# EAGLE board promini5.5cm (EAGLE 9.6.2)
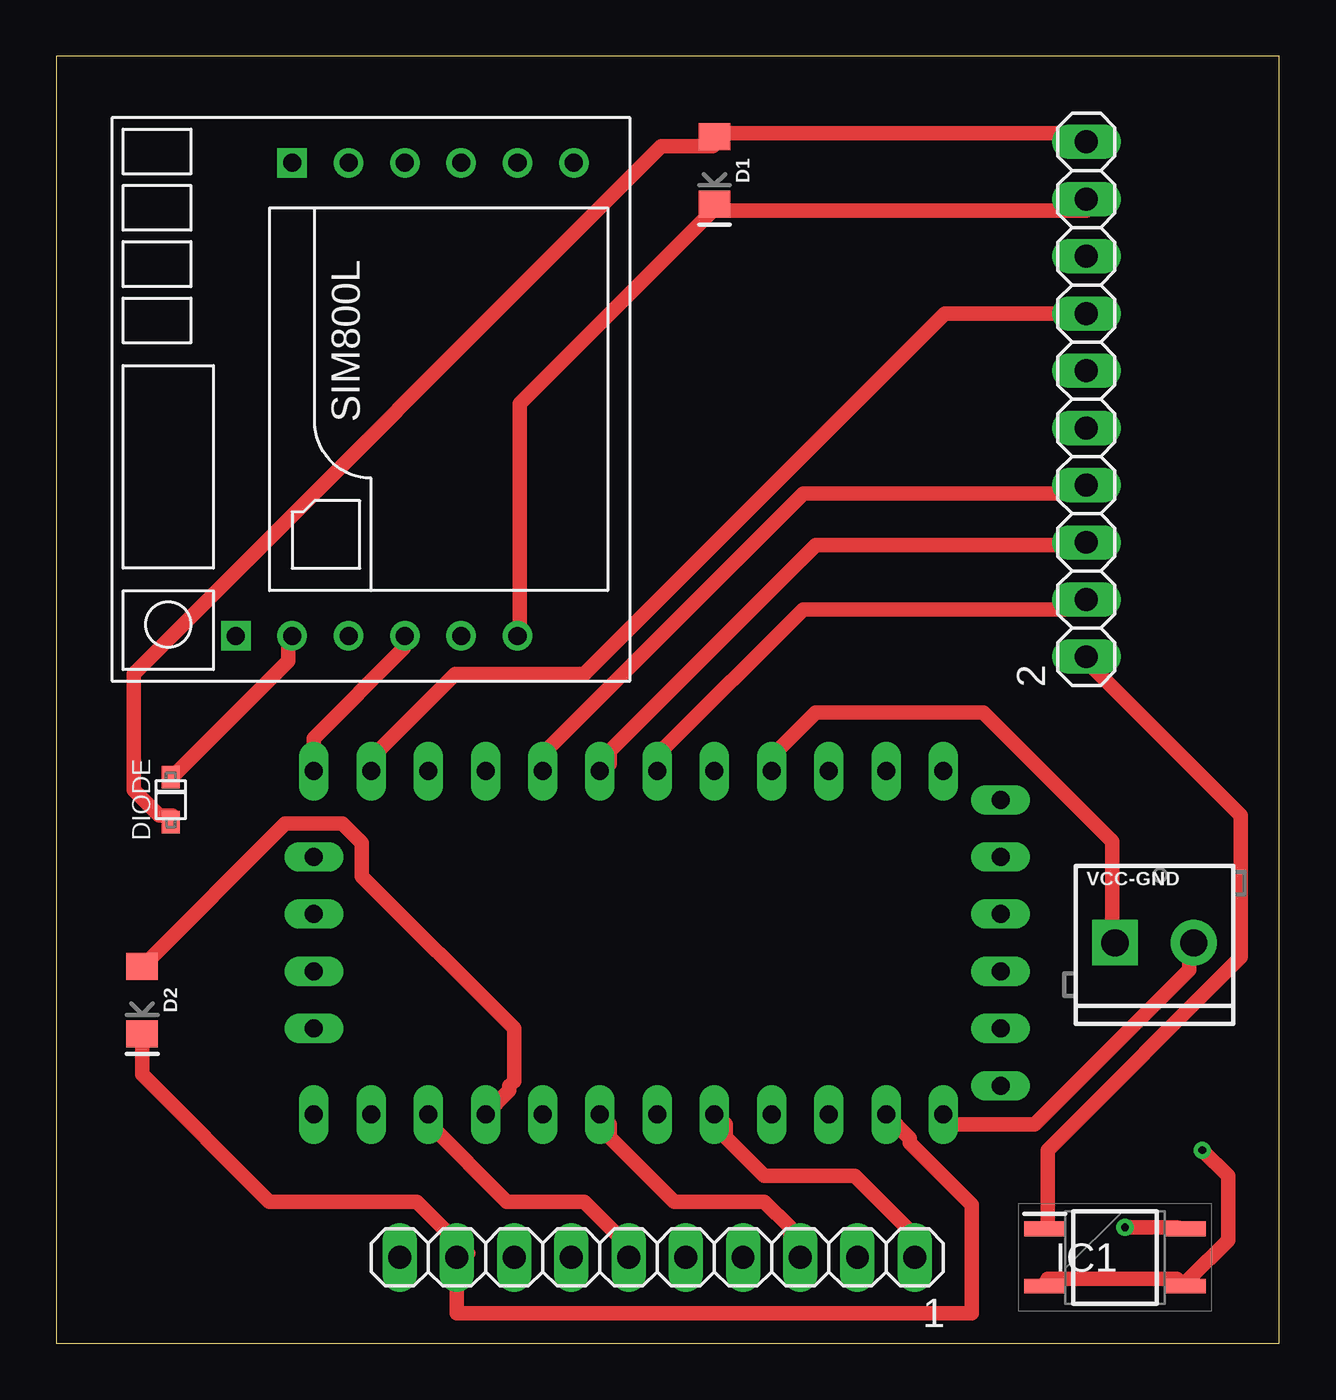
[diagram p0: board, top side]
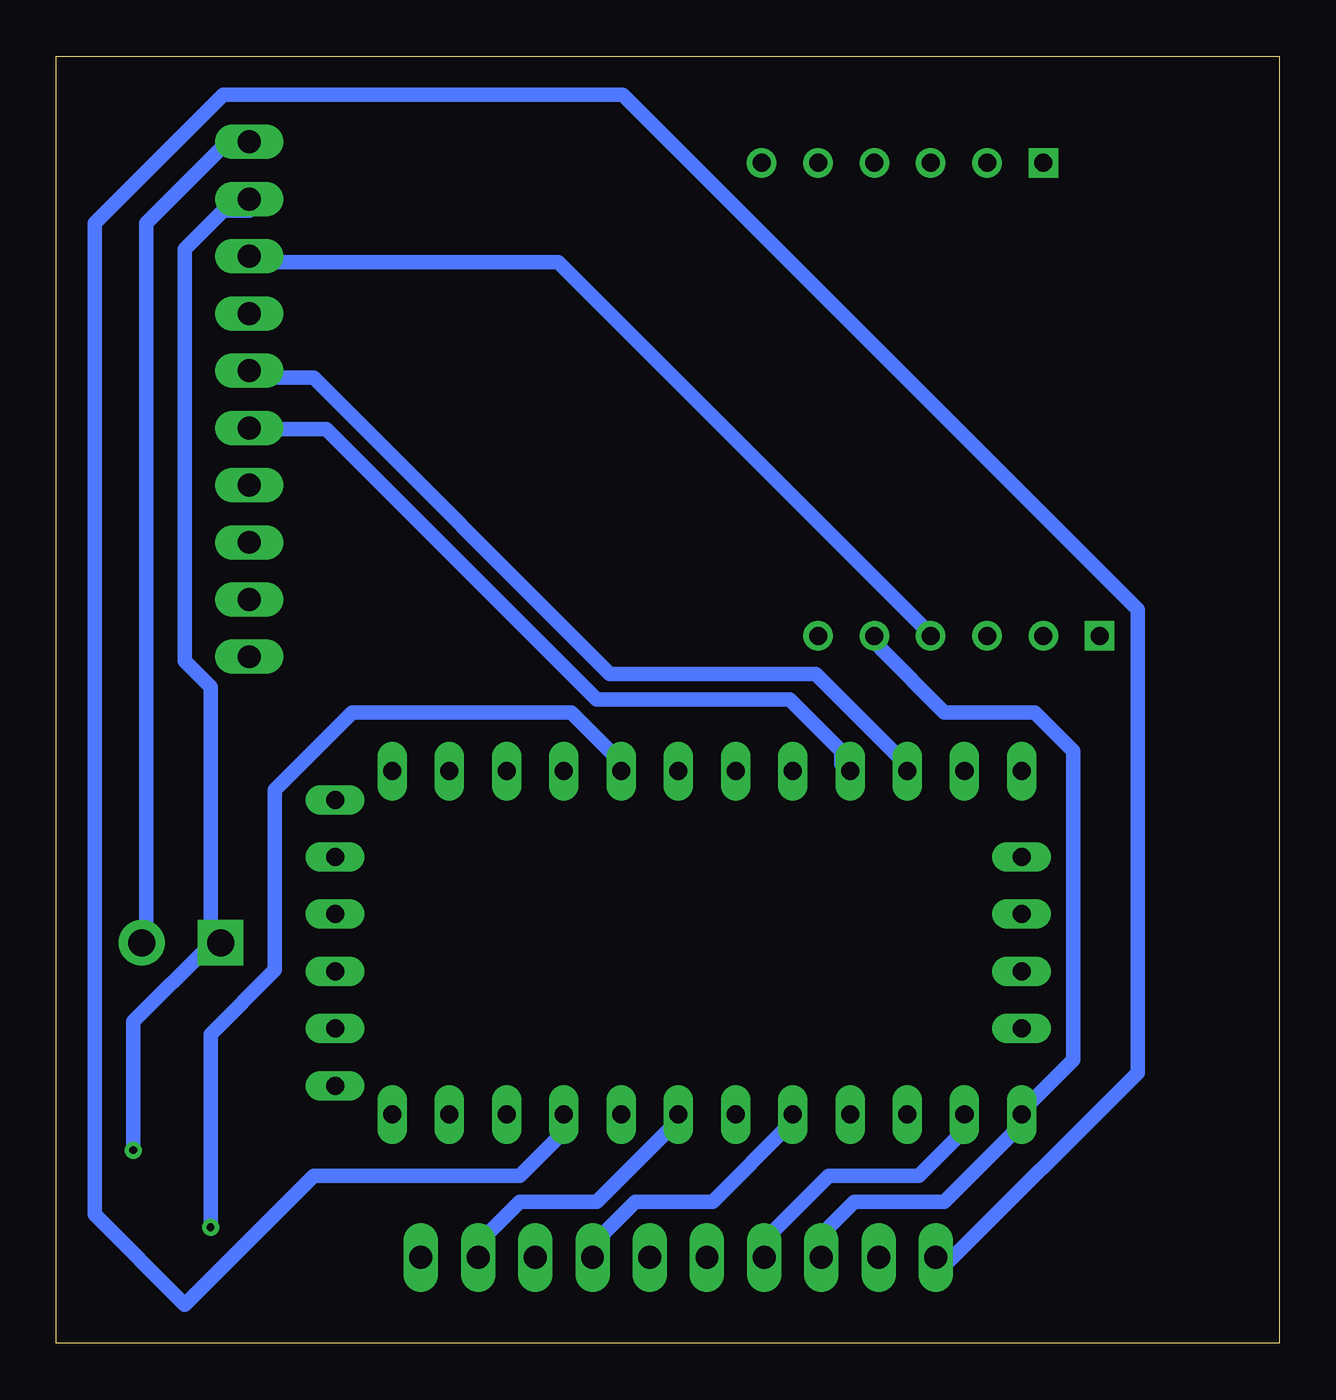
[diagram p1: board, bottom side, seen from below]

Size 54.28 x 57.14 mm. Coordinates in mm from the lower left corner, seen from the top.
Outline: 0,0 54.28,0 54.28,57.14 0,57.14 0,0
Copper layers (1*16): Top 0.035mm / dielectric 1.5mm / Bottom 0.035mm
Design rules "default *": minimum track width 25mil, minimum drill 0.35mm, track to track 20mil, track to pad 20mil, pad to pad 6mil, via to via 6mil, smd to smd 6mil, copper to edge 40mil, drill to drill 6mil, minimum pad ring 10mil, minimum via ring 8mil, stop-mask expansion 4mil, vias tented up to drill 0mil, thermal gap 10mil

## Footprints (pad centres in the part's own frame; a part is rotated, then mirrored left to right if it is on the bottom)
1X10 = drill 1.016 long: 1 -11.43,0; 2 -8.89,0; 3 -6.35,0; 4 -3.81,0; 5 -1.27,0; 6 1.27,0; 7 3.81,0; 8 6.35,0; 9 8.89,0; 10 11.43,0
LED-1206 = smd 1.2 x 1.4: A -1.5,0; C 1.5,0
SOD-323F = smd 1 x 0.8: A -1,0; C 1,0
SOP254P700X200-4N = smd 1.825 x 0.65: 1 -3.112,1.27; 2 -3.112,-1.27; 3 3.112,-1.27; 4 3.112,1.27
PRO-MINI = drill 0.8 long: A0 8.89,8.89; A1 8.89,11.43; A2 8.89,13.97; A3 8.89,16.51; A4 -2.54,-1.27; A5 0,-1.27; A6 2.54,-1.27; A7 5.08,-1.27; D2 -6.35,16.51; D3 -6.35,13.97; D4 -6.35,11.43; D5 -6.35,8.89; D6 -6.35,6.35; D7 -6.35,3.81; D8 -6.35,1.27; D9 -6.35,-1.27; D10 8.89,-1.27; D11 8.89,1.27; D12 8.89,3.81; D13 8.89,6.35; DTR 7.62,29.21; GND 8.89,24.13; GND1 -6.35,19.05; GND2 -5.08,29.21; GND3 -2.54,29.21; RAW 8.89,26.67; RST 8.89,21.59; RST1 -6.35,21.59; RX1 -6.35,24.13; RX1-1 2.54,29.21; TX0 -6.35,26.67; TX0-1 5.08,29.21; VCC 8.89,19.05; VCC1 0,29.21
SIM800LMODULE = drill 0.8: DTR 10.5,1; GND -10.5,-6.5; MIC+ 10.5,-1.5; MIC- 10.5,-4; RST -10.5,1; RX -10.5,-1.5; SPK+ 10.5,-6.5; SPK- 10.5,-9; TX -10.5,-4; VCC -10.5,3.5 | drill 0.8 square: NET -10.5,6; RING 10.5,3.5
SCREWTERMINAL-3.5MM-2 = drill 1.2 pad 2.032 square: 1 0,0 | drill 1.2 pad 2.032: 2 3.5,0

## Placement (x,y rotation side)
1  [1X10]  26.67,3.81 180 top
2  [1X10]  45.72,41.91 90 top
D1  RED  [LED-1206]  29.21,52.07 270 top
D2  RED  [LED-1206]  3.81,15.24 270 top
DIODE  [SOD-323F]  5.08,24.13 90 top
IC1  EL357N-B-TA-G  [SOP254P700X200-4N]  46.99,3.81 0 top
PROMINI  PRO-MINI  [PRO-MINI]  12.7,19.05 270 top
U$1  SIM800LMODULE  [SIM800LMODULE]  13.97,41.91 90 top
VCC-GND  [SCREWTERMINAL-3.5MM-2]  46.99,17.78 0 top

## Library data of the parts
1 2 = pinhead
D1 D2 = SparkFun-LED; PROD_ID: DIO-09912
DIODE = adafruit
IC1 = EL357N-B-TA-G; DESCRIPTION: Optoisolator Transistor Output 3750Vrms 1 Channel 4-SOP (2.54mm); HEIGHT: 2mm; MANUFACTURER_NAME: Everlight Elec; MANUFACTURER_PART_NUMBER: EL357N-B-TA-G
PROMINI = Arduino-clone
U$1 = SIM800LMODULE
VCC-GND = SparkFun-Retired; PROD_ID: CONN-08399

## Nets
D2,D3,D4,D5-IO0,D6-IO2,D7-IO4,D8-IO5,D9-IO9,GND,VIN: 2.6 PROMINI.D7
N$1: 2.10 D1.A DIODE.A PROMINI.RAW VCC-GND.2
N$3: DIODE.C U$1.VCC
N$4: 1.10 PROMINI.VCC
N$5: IC1.4 PROMINI.D2
N$6: 2.8 PROMINI.D9 U$1.RX
N$8: 2.1 IC1.1
N$9: 2.2 PROMINI.D3
N$10: 2.3 PROMINI.D4
N$11: 2.4 PROMINI.D5
N$12: 2.5 PROMINI.D6
N$14: 2.7 PROMINI.D8
N$16: 1.1 PROMINI.A3
N$17: 1.2 PROMINI.A2
N$18: 1.3 PROMINI.A1
N$19: 1.4 PROMINI.A0
N$20: D2.A PROMINI.D13
N$21: 1.6 PROMINI.D12
N$22: 1.7 PROMINI.D11
N$23: 1.8 PROMINI.D10 U$1.TX
N$24: 1.9 D2.C PROMINI.GND
N$26: 2.9 D1.C IC1.2 IC1.3 PROMINI.GND1 U$1.GND VCC-GND.1

## Tracks (layer width: path | path; a pad name or v marks a point on that pad's centre or on a via)
D2,D3,D4,D5-IO0,D6-IO2,D7-IO4,D8-IO5,D9-IO9,GND,VIN
  Bottom 0.635: PROMINI.D7 16.57,25.72 20.57,29.72 29.72,29.72 42.86,42.86 45.72,42.86 2.6
N$1
  Top 0.635: PROMINI.RAW 39.43,9.72 43.43,9.72 50.29,16.57 50.29,17.72 VCC-GND.2 | DIODE.A 5.14,23.43 4.57,23.43 3.43,24.57 3.43,29.72 26.86,53.15 29.15,53.15 D1.A 29.72,53.72 45.72,53.72 2.10
  Bottom 0.635: VCC-GND.2 50.29,18.29 50.29,49.72 46.86,53.15 45.72,53.15 2.10
N$3
  Top 0.635: DIODE.C 5.14,25.15 10.29,30.29 10.29,30.86 U$1.VCC
N$4
  Bottom 0.635: PROMINI.VCC 32,9.72 32,9.14 33.72,7.43 42.86,7.43 48.58,1.71 52.58,5.71 52.58,49.72 46.86,55.44 29.15,55.44 6.29,32.58 6.29,12 14.86,3.43 1.10
N$5  (via drill 0.35)
  Top 0.635: v47.43,5.14 49.72,5.14 IC1.4
  Bottom 0.635: v47.43,5.14 47.43,13.72 44.58,16.57 44.58,24.57 41.15,28 31.43,28 29.15,25.72 PROMINI.D2
N$6
  Top 0.635: PROMINI.D9 11.43,26.86 15.43,30.86 U$1.RX
  Bottom 0.635: 2.8 45.72,48.01 32,48.01 15.43,31.43 U$1.RX
N$8
  Top 0.635: IC1.1 44.01,5.14 44.01,8.57 52.58,17.14 52.58,23.43 45.72,30.29 2.1
N$9
  Top 0.635: PROMINI.D3 26.86,25.72 26.86,26.29 33.15,32.58 45.72,32.58 2.2
N$10
  Top 0.635: PROMINI.D4 24.57,25.72 24.57,26.29 33.72,35.43 45.72,35.43 2.3
N$11
  Top 0.635: PROMINI.D5 21.72,25.72 21.72,26.29 33.15,37.72 45.72,37.72 2.4
N$12
  Bottom 0.635: PROMINI.D6 19.43,25.72 19.43,26.29 21.72,28.57 30.29,28.57 42.29,40.58 45.72,40.58 2.5
N$14
  Top 0.635: 2.7 39.43,45.72 23.43,29.72 17.72,29.72 14.29,26.29 14.29,25.72 PROMINI.D8
N$16
  Top 0.635: PROMINI.A3 29.72,9.72 29.72,9.14 31.43,7.43 35.43,7.43 37.72,5.14 37.72,4 1.1
N$17
  Bottom 0.635: PROMINI.A2 26.86,9.72 30.29,6.29 33.72,6.29 36.01,4 1.2
N$18
  Top 0.635: PROMINI.A1 24.57,9.72 24.57,9.14 27.43,6.29 31.43,6.29 32.58,5.14 32.58,4 1.3
N$19
  Bottom 0.635: PROMINI.A0 21.72,9.72 25.15,6.29 28.57,6.29 30.86,4 1.4
N$20
  Top 0.635: D2.A 3.83,16.74 10.16,23.07 12.7,23.07 13.56,22.2 13.56,20.73 20.32,13.97 20.32,11.64 20.11,11.43 20.11,11.22 PROMINI.D13
N$21
  Top 0.635: PROMINI.D12 16.57,9.72 20,6.29 23.43,6.29 25.72,4 1.6
N$22
  Bottom 0.635: 1.7 22.86,4.57 20,7.43 16,7.43 14.29,9.14 14.29,9.72 PROMINI.D11
N$23
  Bottom 0.635: 1.8 20,4 20,5.14 18.86,6.29 14.86,6.29 11.43,9.72 PROMINI.D10 11.43,10.29 9.14,12.57 9.14,26.29 10.86,28 14.86,28 17.72,30.86 U$1.TX
N$24
  Top 0.635: D2.C 3.81,11.94 9.46,6.29 16,6.29 18.29,4 1.9 17.78,1.33 40.64,1.33 40.64,6.14 37.89,8.89 37.89,9.1 PROMINI.GND
N$26  (via drill 0.35)
  Top 0.635: IC1.2 44.01,2.86 49.72,2.86 IC1.3 50.29,2.86 52.01,4.57 52.01,7.43 v50.86,8.57 | PROMINI.GND1 32,25.72 32,26.29 33.72,28 41.15,28 46.86,22.29 46.86,18.29 VCC-GND.1 | 2.9 45.72,50.29 29.72,50.29 D1.C 29.15,50.29 20.57,41.72 20.57,31.43 U$1.GND
  Bottom 0.635: v50.86,8.57 50.86,14.29 47.43,17.72 VCC-GND.1 47.43,18.29 47.43,29.15 48.58,30.29 48.58,48.58 46.86,50.29 45.72,50.29 2.9